# Altium PCB CurrentS_2.PcbDoc
Units mil, origin at the board's own origin, x right, y up, seen from the top; angles counter-clockwise.
Board outline 9000 x 3000 mil, 2 copper layers (Top Layer, Bottom Layer); 70 components, 36 nets, 196 pads, 18 vias.
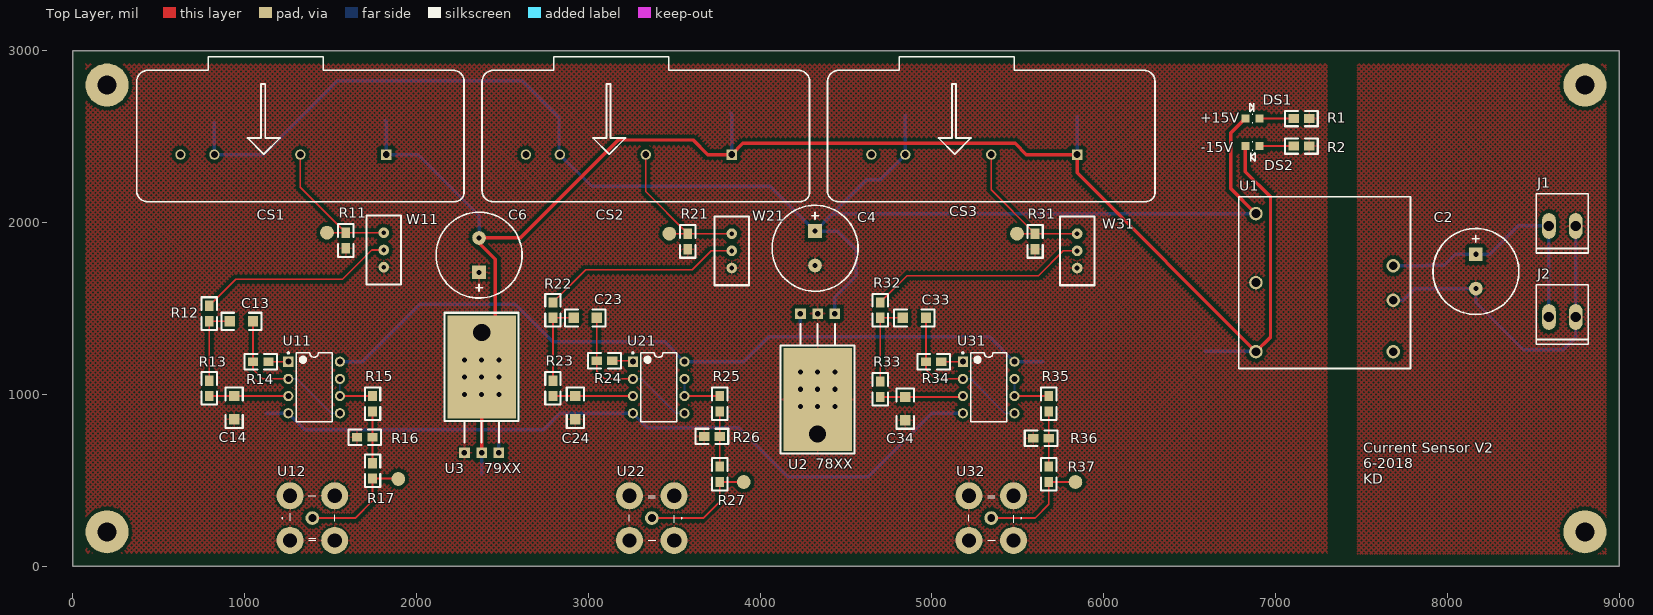
[diagram p0: Top Layer view]
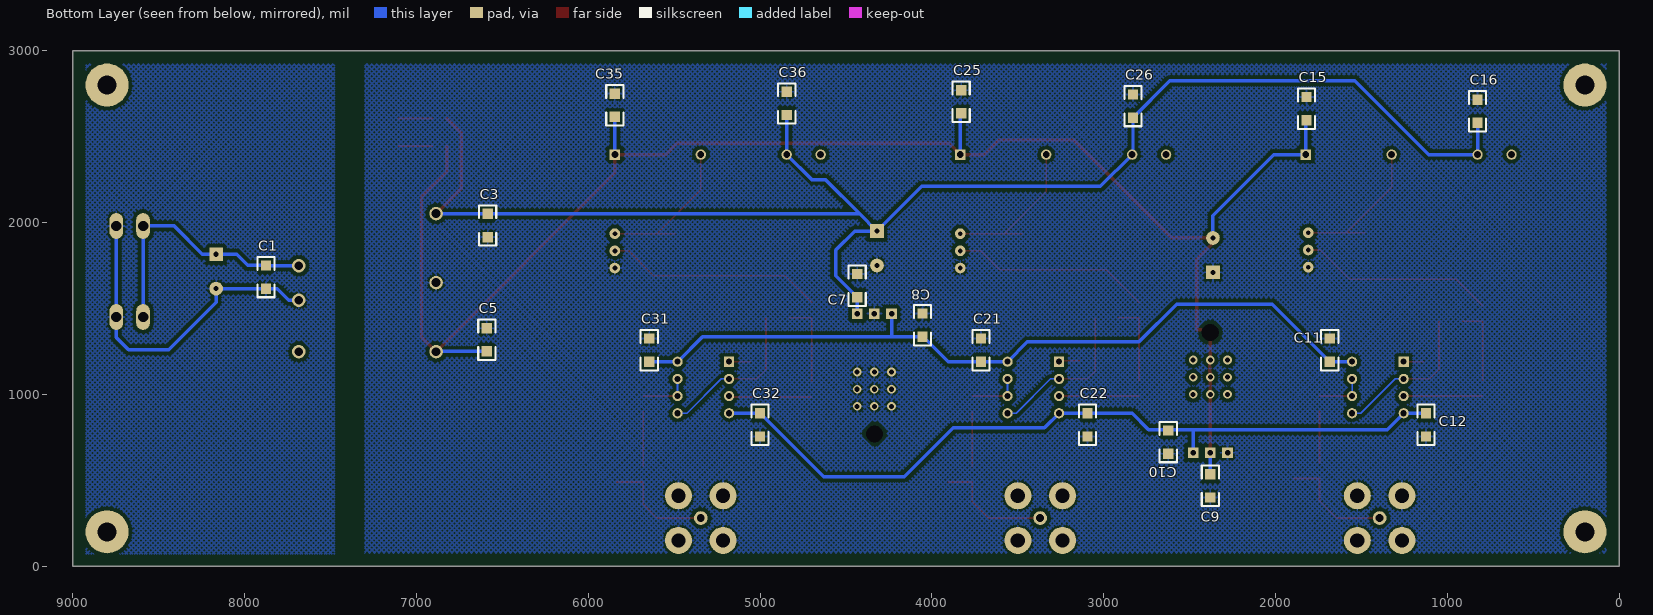
[diagram p1: Bottom Layer view, seen from below]

## Layer stack, top to bottom
Top Solder: solder mask 0.4, Solder Resist, Dk 3.5
Top Layer: signal copper 1.4
Dielectric 1: dielectric 12.6, FR-4, Dk 4.8
Bottom Layer: signal copper 1.4
Bottom Solder: solder mask 0.4, Solder Resist, Dk 3.5

## Board outline
0,0 9000,0 9000,3000 0,3000

## Design rules (kind name [scope] priority, off if disabled: settings)
AssemblyTestPointUsage [All] p1: valid=2
Clearance [All] p1: gap=20 ignorepadtopadclearanceinfootprint=FALSE
Height [All] p1: minheight=0 maxheight=2000 prefheight=500
HoleSize [All] p1: absolutevalues=TRUE maxlimit=150 minlimit=1 maxpercent=80.000 minpercent=20.000
NetAntennae [All] p1: netantennaetolerance=1
PolygonConnect [All] p1: connectstyle=Relief reliefconductorwidth=10 reliefentries=4 polygonreliefangle="90 Angle" airgapwidth=10
RoutingVias [All] p1: holewidth=28 width=50 viastyle="Through Hole" minholewidth=28 minwidth=50 maxholewidth=30 maxwidth=50
SilkToSilkClearance [All] p1: silktosilkclearance=5
SilkToSolderMaskClearance [IsPad] p1: minsilkscreentomaskgap=5 clearancetoexposedcopper=TRUE
SolderMaskExpansion [All] p1: expansion=4
UnRoutedNet [All] p1: checkbadconnections=TRUE
Width Pwr_Width [(InNet('+Vin') OR InNet('-Vin') OR InNet('+15V') OR InNet('-15V') OR InNet('+9V') OR InNet('-9V'))] p1: maxlimit=30 minlimit=20 preferedwidth=20
Width [All] p2: maxlimit=10 minlimit=10 preferedwidth=10
23 further rules are at their usual default settings.

## Components (designator, comment, footprint, x,y, rotation, side; value= is the part's Value field where it differs from the comment)
C1 "CAP1" C1206 7875,1615 r90 bottom value=100pF
C2 "ECAP" CAP.2/.5 8165,1815 r270 top value=10uF/10V
C3 "CAP1" C1206 6585,1915 r90 bottom value=100pF
C4 "ECAP" CAP.2/.5 4320,1950 r270 top value=10uF/10V
C5 "CAP1" C1206 6590,1250 r90 bottom value=100pF
C6 "ECAP" CAP.2/.5 2365,1710 r90 top value=10uF/10V
C7 "CAP1" C1206 4435,1700 r270 bottom value=100pF
C8 "CAP1" C1206 4055,1470 r270 bottom value=100pF
C9 "CAP1" C1206 2380,400 r90 bottom value=100pF
C10 "CAP1" C1206 2625,655 r90 bottom value=100pF
C11 "CAP1" C1206 1685,1325 r270 bottom value=100pF
C12 "CAP1" C1206 1125,755 r90 bottom value=100pF
C13 "CAP1" C1206 915,1425 r0 top value=100pF
C14 "CAP1" C1206 940,855 r90 top value=100pF
C15 "CAP1" C1206 1820,2730 r270 bottom value=100pF
C16 "CAP1" C1206 825,2715 r270 bottom value=100pF
C21 "CAP1" C1206 3715,1325 r270 bottom value=100pF
C22 "CAP1" C1206 3095,755 r90 bottom value=100pF
C23 "CAP1" C1206 2915,1445 r0 top value=100pF
C24 "CAP1" C1206 2925,855 r90 top value=100pF
C25 "CAP1" C1206 3830,2770 r270 bottom value=100pF
C26 "CAP1" C1206 2830,2745 r270 bottom value=100pF
C31 "CAP1" C1206 5645,1325 r270 bottom value=100pF
C32 "CAP1" C1206 5000,755 r90 bottom value=100pF
C33 "CAP1" C1206 4830,1445 r0 top value=100pF
C34 "CAP1" C1206 4845,850 r90 top value=100pF
C35 "CAP1" C1206 5845,2750 r270 bottom value=100pF
C36 "CAP1" C1206 4845,2760 r270 bottom value=100pF
CS1 "LA 125-P" "LA 125-P" 2277.76,2885.16 r180 top locked
CS2 "LA 125-P" "LA 125-P" 4287.76,2885.16 r180 top locked
CS3 "LA 125-P" "LA 125-P" 6297.76,2885.16 r180 top locked
DS1 "SML-LXT0805GW-TR" LUMX-SML-LXT0805_V 6865,2605 r0 top
DS2 "SML-LXT0805GW-TR" LUMX-SML-LXT0805_V 6865,2445 r180 top
J1 "CON2" 3100-8-102-01 8588,1968 r270 top
J2 "CON2" 3100-8-102-01 8588,1438 r270 top
R1 "Res1" R0805 7195,2605 r180 top value=698
R2 "Res1" R0805 7195,2445 r180 top value=698
R11 "Res1" R0805 1590,1850 r90 top value=1K
R12 "Res1" R0805 795,1425 r90 top value=1K
R13 "Res1" R0805 795,990 r90 top value=1K
R14 "Res1" R0805 1050,1190 r0 top value=1K
R15 "Res1" R0805 1745,900 r90 top value=1K
R16 "Res1" R0805 1745,750 r180 top value=1K
R17 "Res1" R0805 1745,510 r90 top value=1K
R21 "Res1" R0805 3580,1845 r90 top value=1K
R22 "Res1" R0805 2795,1445 r90 top value=1K
R23 "Res1" R0805 2795,990 r90 top value=1K
R24 "Res1" R0805 3050,1195 r0 top value=1K
R25 "Res1" R0805 3765,900 r90 top value=1K
R26 "Res1" R0805 3765,755 r180 top value=1K
R27 "Res1" R0805 3765,490 r90 top value=1K
R31 "Res1" R0805 5600,1845 r90 top value=1K
R32 "Res1" R0805 4700,1445 r90 top value=1K
R33 "Res1" R0805 4700,985 r90 top value=1K
R34 "Res1" R0805 4965,1190 r0 top value=1K
R35 "Res1" R0805 5680,900 r90 top value=1K
R36 "Res1" R0805 5680,745 r180 top value=1K
R37 "Res1" R0805 5680,490 r90 top value=1K
U1 "PDQ15-Q24-D15-D" PDQ15-Q24-D15-D 6784.61,2150 r270 top
U2 "78XX" TO-220#1 4435,1470 r180 top locked
U3 "79XX" TO-220#2 2280,660 r0 top locked
U11 "OPA2132P" P0008A 1405,1040 r0 top locked
U12 "BNC Elbow male" 5-1814400-1 1394.92,280.08 r180 top value=Value
U21 "OPA2132P" P0008A 3410,1040 r0 top locked
U22 "BNC Elbow male" 5-1814400-1 3369.96,280.08 r0 top value=Value
U31 "OPA2132P" P0008A 5330,1040 r0 top locked
U32 "BNC Elbow male" 5-1814400-1 5345,280.08 r0 top value=Value
W11 "RPot1" VR5 1810,1740 r90 top value=1K
W21 "RPot1" VR5 3835,1735 r90 top value=1K
W31 "RPot1" VR5 5845,1735 r90 top value=1K

## Footprints (in the part's own frame and the unit in brackets; to place one, negate y for a bottom-side part, rotate by r counter-clockwise, add the part's x,y. Pads: shape width x height; smd on the part's side, far side on the other; paste and mask are expansions set on the pad)
5-1814400-1 [mm]
  round 2.032 / inner round 1.524 / far side round 2.032 hole 1.17: 1(0,0)
  round 4 hole 2.11: 2(-3.3,3.3) 3(-3.3,-3.3) 5(3.3,3.3)
  round 4 hole 2.11 paste+1: 4(3.3,-3.3)
  silkscreen extent -3.3,-3.3 4.5,3.3, body extent 0,0 0.25,0.25, height 0.25
3100-8-102-01 [mil]
  oval 150x80 hole 60: 1(-12,2) 2(-12,158)
  silkscreen extent -200,-71 146,231
C1206 [mil]
  rect 60x60 smd: 1(0,0) 2(135,0)
  silkscreen extent -50,-50 185,50, body extent -10,-30 155,35, height 50
CAP.2/.5 [mil] "ESMG500ELL102MK25S"
  rect 80x80 hole 30: 1(0,0)
  round 80 hole 30: 2(200,0)
  silkscreen extent -150,-250 350,250
"LA 125-P" [mil] "LEM hall-effect current sensor(footprint)"
  round 60 hole 40: 1(952.76,490.16) 2(1452.76,490.16) 4(1650.39,490.16)
  rect 60x60 hole 40: 3(452.76,490.16)
  silkscreen extent 0,-79 1906,764
LUMX-SML-LXT0805_V [mm] "SMD, 2-Leads, Body 2x1.25mm"
  rect 1.2x1.2 smd: 1(-1.05,0) 2(1.05,0)
  silkscreen extent -0.41,-0.63 0.23,2.25, body extent -1,-0.63 1,0.63, height 0.8
P0008A [mm] "DIP, 8-Leads, Body 10.15x6.6mm, Pitch 2.54mm"
  rect 1.5x1.5 hole 0.9: 1(-3.81,3.81)
  round 1.5 hole 0.9: 2(-3.81,1.27) 3(-3.81,-1.27) 4(-3.81,-3.81) 5(3.81,-3.81) 6(3.81,-1.27) 7(3.81,1.27) 8(3.81,3.81)
  silkscreen extent -3.93,-5.1 2.65,5.23, body extent -3.95,-5.07 3.95,5.07, height 5.08
PDQ15-Q24-D15-D [mm] "+/-15V 15W output DC/DC converter"
  round 2 hole 1.3: 1(10.2,22.85) 2(15.3,22.85) 3(2.5,2.55) 4(12.7,2.55) 5(22.9,2.55) 6(22.9,22.85)
  silkscreen extent 0,0 25.4,25.4, body extent 0.1,0.1 25.5,25.5, height 10.2
R0805 [mil]
  rect 60x50 smd: 1(0,0) 2(90,0)
  silkscreen extent -50,-45 140,45, body extent -10,-25 100,25, height 40
TO-220#1 [mil]
  rect 62x62 hole 32: 1(0,0) 2(100,0) 3(200,0)
  round 60 hole 100: 4(100,700)
  rect 400x600 smd: 5(100,500)
  silkscreen extent -115,60 315,815
TO-220#2 [mil]
  rect 62x62 hole 32: 1(0,0) 2(100,0) 3(200,0)
  round 60 hole 100: 4(100,700)
  rect 400x600 smd mask+4: 5(100,500)
  silkscreen extent -115,60 315,815
VR5 [mil]
  round 62 hole 28: 1(0,0) 2(100,0) 3(200,0)
  silkscreen extent -100,-100 300,100

## Part data
C1 C3 C5 C7 C8 C9 C10 C11 C12 C13 C14 C15 C16 C21 C22 C23 C24 C25 C26 C31 C32 C33 C34 C35 C36: library part C3216C0G2J101J060AA, "100pF ±5% 630V C0G, NP0 Ceramic Capacitor -55°C ~ 125°C Surface Mount, MLCC 1206 (3216 Metric) 0.126\" L x 0.063\" W (3.20mm x 1.60mm)", Manufacturer="Generic Components", Class I=Passive, Class II=Capacitor, Published=8-Jun-2000, Publisher="Altium Limited", Revision="July-2002: Re-released for DXP Platform."
C2 C4 C6: "Polarized Capacitor (Surface Mount)", Manufacturer="Generic Components", Class I=Passive, Class II=Capacitor, Published=8-Jun-2000, Publisher="Altium Limited", Revision="July-2002: Re-released for DXP Platform."
CS1 CS2 CS3: "Hall-effect current transducer from LEM", Case/Package=125, Manufacturer=LEM, Manufacturer Part Number=LA125-P, Max Frequency=100kHz, Max Operating Temperature=85°C, Max Supply Voltage (DC)=15V, Min Operating Temperature=-40°C, Min Supply Voltage (DC)=12V, Secondary Current=125mA, Supplier Part Number 1=R1039558, Accuracy=0.8%, ComponentLink1Description=https://datasheet.ciiva.com/3327/la125p-eng-tds-3327505.pdf, ComponentLink1URL=https://datasheet.ciiva.com/3327/la125p-eng-tds-3327505.pdf, ComponentLink2Description=https://datasheet.ciiva.com/1309/51624-1309927.pdf, ComponentLink2URL=https://datasheet.ciiva.com/1309/51624-1309927.pdf, Mount=PCB, Operating Supply Voltage=15V, REACH SVHC="No SVHC", Response Time=1us, Stock 2=95, Supplier 1="Allied Electronics", Supplier 2=Element14, Supplier 3=Newark, Supplier Part Number 2=1617406, Supplier Part Number 3=01P0384, Wire/Cable Diameter=11mm
DS1 DS2: library part CMP-1724-00001-1, "LED, GREEN, 565 nm, 2 V, -25 to 80 degC, 2-Pin SMD, RoHS, Tape and Reel", Case\/Package=0805, Case Code (Metric)=2012, Max Operating Temperature="85 degC", Min Operating Temperature="-25 degC", Package Quantity=4000, Case Code (Imperial)=0805, ComponentLink1Description="Manufacturer URL", ComponentLink1URL=http://www.lumexinstruments.com/, ComponentLink2Description=Datasheet, ComponentLink2URL=http://www.lumex.com/content/files/ProductAttachment/SML-LXT0805GW-TR.pdf, DatasheetVersion="Rev. F, 09/2009", Length="2 mm", Mount="Surface Mount", Mounting Technology="Surface Mount", PackageDescription="2-Pin Surface Mount Device, Body 2 x 1.25 mm", PackageReference=SML-LXT0805, Packaging="Tape and Reel", REACH SVHC="No SVHC", RoHSCompliant=true, Width="1.25 mm"
J1 J2: "Connector"
R1 R2: library part RC0805FR-07698RL, "RES SMD 698 OHM 1% 1/8W 0805", Manufacturer="Generic Components", Class I=Passive, Class II=Resistor, Published=8-Jun-2000, Publisher="Altium Limited", Revision="July-2002: Re-released for DXP Platform."
R11 R21 R31: library part RC0805JR-0733RL, "YAGEO (PHYCOMP)         RC0805JR-0733RL             SMD Chip Resistor, Thick Film, 33 ohm, 150 V, 0805 [2012 Metric], 250 mW,  5%, RC Series", Manufacturer="Generic Components", Class I=Passive, Class II=Resistor, Published=8-Jun-2000, Publisher="Altium Limited", Revision="July-2002: Re-released for DXP Platform."
R12 R13 R14 R15 R16 R17 R22 R23 R24 R25 R26 R27 R32 R33 R34 R35 R36 R37: library part RC0805FR-071KL, "RES SMD 1K OHM 1% 1/8W 0805", Manufacturer="Generic Components", Class I=Passive, Class II=Resistor, Published=8-Jun-2000, Publisher="Altium Limited", Revision="July-2002: Re-released for DXP Platform."
U1: "Isolated DC/DC Converters 15W 9-36Vin +/-15V +/-500mA Iso Reg DIP", Case/Package=DIP, Isolation Voltage=1.5kV, Manufacturer=CUI, Max Input Voltage=36V, Max Operating Temperature=105°C, Max Output Current=500mA, Max Power Dissipation=15W, Min Input Voltage=9V, Min Operating Temperature=-40°C, Supplier Part Number 1=102-3878-ND, Voltage - Output 1=15V, Voltage - Output 2=-15V, ComponentLink1Description=http://www.cui.com/product/resource/digikeypdf/pdq15-d.pdf, ComponentLink1URL=http://www.cui.com/product/resource/digikeypdf/pdq15-d.pdf, Efficiency=88%, Features=UVLO,OVP, Height=0.4inch, Lead Free="Lead Free", Length=1inch, Manufacturer Part Number=PDQ15-Q24-D15-D, Mount="Through Hole", Number of Outputs=2, Packaging=Rail/Tube, Pricing 1="1=31.77, 5=31.524, 10=31.28, 25=30.7912, 50=29.325, 100=26.8813, 250=26.3925 (USD)", Stock 1=60, Supplier 1=Digi-Key, Supplier 2=Mouser, Supplier Part Number 2=490-PDQ15-Q24-D15-D, Width=1inch
U2: "1A linear positive voltage regulator", Case/Package=TO-220, Current Rating=1A, Dropout Voltage=2V, Manufacturer="ON Semiconductor", Manufacturer Part Number=MC7809CTG, Max Input Voltage=35V, Max Operating Temperature=125°C, Min Input Voltage=11V, Min Operating Temperature=0°C, Min Output Voltage=9V, Output Voltage Accuracy=4%, Package Quantity=50, Power Supply Rejection Ratio (PSRR)=61dB, Quiescent Current=8mA, Supplier Part Number 1=MC7809CTGOS-ND, Tolerance=5%, Accuracy=4%, ComponentLink1Description=https://datasheet.ciiva.com/2043/mc7800-d-2043830.pdf, ComponentLink1URL=https://datasheet.ciiva.com/2043/mc7800-d-2043830.pdf, ComponentLink2Description=https://datasheet.ciiva.com/8073/76526-8073704.pdf, ComponentLink2URL=https://datasheet.ciiva.com/8073/76526-8073704.pdf, ComponentLink3Description=https://datasheet.ciiva.com/16394/mc7800-d-16394474.pdf, ComponentLink3URL=https://datasheet.ciiva.com/16394/mc7800-d-16394474.pdf, ComponentLink4Description=https://datasheet.ciiva.com/14149/igspannungsregler-mc78xx-en-14149791.pdf, ComponentLink4URL=https://datasheet.ciiva.com/14149/igspannungsregler-mc78xx-en-14149791.pdf, ComponentLink5Description=https://datasheet.ciiva.com/25979/mc7800-d-25979775.pdf, ComponentLink5URL=https://datasheet.ciiva.com/25979/mc7800-d-25979775.pdf, ComponentLink6Description=https://datasheet.ciiva.com/26903/mc7809ctg-26903014.pdf, ComponentLink6URL=https://datasheet.ciiva.com/26903/mc7809ctg-26903014.pdf, Contact Plating=Tin,Matte, Halogen Free="Halogen Free", Height=0.62inch, Lead Free="Lead Free", Length=0.404inch, Max Output Current=1A, Mount="Through Hole", Nominal Output Voltage=9V, Number of Outputs=1, Number of Pins=3, Number of Regulators=1, Operating Supply Voltage=35V, Output Current=1A, Output Voltage=9V, Packaging=Rail/Tube, Polarity=Positive, Pricing 1="1=0.64, 10=0.548, 100=0.4091, 500=0.3214, 1000=0.2484 (USD)", Radiation Hardening=No, REACH SVHC="No SVHC", Stock 1=0, Supplier 1=Digi-Key, Weight=0.01lb, Width=0.19inch
U3: "1A linear negative voltage regulator", Case/Package=TO-220-3, Dropout Voltage=2V, Manufacturer="ON Semiconductor / Fairchild", Manufacturer Part Number=KA7909TU, Max Input Voltage=-35V, Max Operating Temperature=125°C, Max Output Current=1A, Min Input Voltage=-11.5V, Min Operating Temperature=0°C, Min Output Voltage=-9V, Output Voltage Accuracy=4%, Package Quantity=50, Power Supply Rejection Ratio (PSRR)=60dB, Quiescent Current=6mA, Supplier Part Number 1=KA7909TUFS-ND, Tolerance=5%, Accuracy=4%, ComponentLink1Description=https://datasheet.ciiva.com/26254/ka7924-26254938.pdf, ComponentLink1URL=https://datasheet.ciiva.com/26254/ka7924-26254938.pdf, ComponentLink2Description=https://datasheet.ciiva.com/14170/zpfairchild-spannungsregler-ka-en-14170555.pdf, ComponentLink2URL=https://datasheet.ciiva.com/14170/zpfairchild-spannungsregler-ka-en-14170555.pdf, ComponentLink3Description=https://datasheet.ciiva.com/3224/ka7924-3224893.pdf, ComponentLink3URL=https://datasheet.ciiva.com/3224/ka7924-3224893.pdf, ComponentLink4Description=https://datasheet.ciiva.com/17366/ka7909-17366829.pdf, ComponentLink4URL=https://datasheet.ciiva.com/17366/ka7909-17366829.pdf, ComponentLink5Description=https://datasheet.ciiva.com/46425/1855684-46425549.pdf, ComponentLink5URL=https://datasheet.ciiva.com/46425/1855684-46425549.pdf, Height=15.95mm, Lead Free="Lead Free", Length=10mm, Mount="Through Hole", Nominal Output Voltage=-9V, Number of Outputs=1, Number of Pins=3, Number of Regulators=1, Output Current=1A, Output Voltage=-9V, Packaging=Rail/Tube, Polarity=Negative, Pricing 1="1=0.66, 10=0.581, 100=0.4453, 500=0.352, 1000=0.2816 (USD)", Radiation Hardening=No, REACH SVHC="No SVHC", Stock 1=820, Supplier 1=Digi-Key, Weight=1.8g, Width=4.5mm
U11 U21 U31: library part CMP-0271-00384-3, "High Speed FET-Input Operational Amplifier, 5 to 36 V, -40 to 125 degC, 8-pin DIP (P8), Green (RoHS & no Sb/Br)", Manufacturer="Texas Instruments", Rating=Catalog, Total Supply Voltage(Max)(+5V is 5, +/-5V is 10)=36, Total Supply Voltage(Min)(+5V is 5, +/-5V is 10)=5, CMRR(Min)(dB)=96, Code_JEDEC=MS-001, ComponentLink1Description="Manufacturer URL", ComponentLink1URL=http://www.ti.com/, ComponentLink2Description=Datasheet, ComponentLink2URL=http://www.ti.com/lit/ds/symlink/opa2132.pdf, ComponentLink3Description="Package Specification", ComponentLink3URL=http://www.ti.com/litv/pdf/mpdi001b, DatasheetVersion=SBOS054A, Eco-Plan="Green (RoHS & no Sb/Br)", GBW(Typ)(MHz)=8, IIB(Max)(pA)=50, Iq per channel(Max)(mA)=4.8, Mounting Technology="Through Hole", Number of Channels=2, Offset Drift(Typ)(uV/C)=2, PackageDescription="8-Pin Plastic In-Line, Body 9.59 x 6.35 mm, Pitch 2.54 mm", PackageReference=P0008A, PackageVersion="4040082/E, 04/2010", Packing=TUBE, PartNumber=OPA2132P, Slew Rate(Typ)(V/us)=20, Sub Family="High Supply Voltage Amplifier (>=30V), Low Noise Amp (<=10nV/rtHz), Low Offset Voltage Amplifier (<=500uV), Precision Amplifier", Vio (25C)(Max)(mV)=0.5
U12 U22 U32: "BNC Low Profile Elbow Connector", Manufacturer_Part_Number=5-1634513-1, Copyright="Copyright (C) 2015 Accelerated Designs. All rights reserved", RefDes=RefDes, Type=Type, Vendor="Tyco Electronics"
W11 W21 W31: library part PV36W202C01B00, "TRIMMER 2K OHM 0.5W TH", Manufacturer="Generic Components", Class I=Passive, Class II=Potentiometer, Published=8-Jun-2000, Publisher="Altium Limited", Revision="July-2002: Re-released for DXP Platform.", Set Position=0.5

## Free pads (board coordinates)
  round 250 hole 110: 2(8800,2800) 3(200,2800) 4(200,200) 5(8800,200)
  round 80 smd: 6(1480,1940.92) 7(3472.01,1935) 8(5495,1935) 9(1895,507.69) 10(3905,490) 11(5835,490)

## Via types
v1: diameter 50, hole 30, Top Layer to Bottom Layer, 17 vias
v2: diameter 50, hole 28, Top Layer to Bottom Layer, 1 vias

## Nets (pads, with @x,y where several pads share a name; then routed paths per layer and width w, separated by ;. In a path a pad name is that pad's centre, name@x,y a point inside that pad or via, vN(x,y) a via of type N, cw(c..) or ccw(c..) an arc to the next point about the centre after c; other vN are vias at no path point)
+9V: C8.2 C11.2 C21.2 C31.2 U2.3 U11.8 U21.8 U31.8 | length 4622.6
  Bottom Layer w20: U11.8 C11.2 2020,1525 2575,1525 2795,1305 3445,1305 U21.8 C21.2 3905,1190 4050,1335 4235,1335 ; U2.3 4235,1335 ; C31.2 U31.8 5335,1335 4235,1335
+15V: C3.2 C4.1 C7.2 C16.2 C26.2 C36.2 CS1.2 CS2.2 CS3.2 DS1.1 U1.3 U2.1 | length 9104
  Top Layer w20: DS1.1 6740,2521.34 6740,2196.57 U1.3
  Bottom Layer w20: C16.2 CS1.2 1110,2395 1540,2825 2615,2825 C26.2 2830,2400 CS2.2 3020,2210 4060,2210 C4.1 ; U2.1 C7.2 4560,1690 4560,1840 4450,1950 C4.1 ; C36.2 CS3.2 4700,2250 4620,2250 4420,2050 ; U1.3 6883.43,2050 C3.2 4420,2050 ; C4.1 4420,2050
+Vin: C1.2 C2.1 J1.1 J2.1 U1.1 | length 1531.7
  Bottom Layer w20: U1.1 7873.43,1748.43 C1.2 7980,1750 8045,1815 C2.1 8245,1815 8410,1980 J1.1 J2.1
-9V: C10.2 C12.2 C22.2 C32.2 U3.3 U11.4 U21.4 U31.4 | length 4575.2
  Bottom Layer w20: C12.2 U11.4 1350,795 2480,795 ; U3.3 2480,795 ; U31.4 C32.2 4630,520 4160,520 3875,805 3345,805 U21.4 C22.2 2835,890 2740,795 2480,795
-15V: C5.1 C6.2 C9.2 C15.2 C25.2 C35.2 CS1.3 CS2.3 CS3.3 DS2.2 U1.5 U3.2 U3.4 U3.5 | length 9931.7
  Top Layer w20: U3.2 v1(2380,1000) v1(2380,1100) 2384.59,1159.65 2385,1165 v1(2380,1200) U3.4 ; U3.5@2380,1375 2460,1375 2460,1785 2365,1880 C6.2 2605,1910 3175,2480 3610,2480 3695,2395 CS2.3 3900,2460 5485,2460 5550,2395 CS3.3 5845,2288.43 U1.5 6970,1333.43 6970,2150 6823.66,2296.34 DS2.2
  Bottom Layer w20: C15.2 1825,2590 CS1.3 2010,2395 2365,2040 C6.2 ; C9.2 U3.2 ; C25.2 3835,2630 CS2.3 ; CS3.3 C35.2 ; C5.1 6883.43,1250 U1.5
  other v1: 2280,1000 2480,1000 2280,1100 2480,1100 2280,1200 2480,1200
-Vin: C1.1 C2.2 J1.2 J2.2 U1.2 | length 1962
  Bottom Layer w20: U1.2 7742.64,1547.64 7810,1615 C1.1 C2.2 8165,1535 8440,1260 8675,1260 8746,1331 J2.2 J1.2
GND: C3.1 C4.2 C5.2 C6.1 C7.1 C8.1 C9.1 C10.1 C11.1 C12.1 C14.1 C15.1 C16.1 C21.1 C22.1 C24.1 C25.1 C26.1 C31.1 C32.1 C34.1 C35.1 C36.1 R1.1 R2.1 R11.1 R16.2 R21.1 R26.2 R31.1 R36.2 U1.4 U2.2 U2.4 U2.5 U3.1 U12.2 U12.3 U12.4 U12.5 U22.2 U22.3 U22.4 U22.5 U32.2 U32.3 U32.4 U32.5 W11.1 W21.1 W31.1
  other v1: 4235,930 4435,930 4235,1030 4335,1030 4435,1030 4235,1130 4335,1130 4435,1130
  other v2: 4335,930
NetC13_1: C13.1 R12.1 R13.2 | length 465
  Top Layer w10: R13.2 R12.1 C13.1
NetC13_2: C13.2 R14.1 U11.2 U11.5 | length 890.6
  Top Layer w10: C13.2 R14.1 1050,1145 1105,1090 U11.2
  Bottom Layer w10: U11.2 1305,1090 1505,890 U11.5
NetC14_2: C14.2 R13.1 U11.3 | length 460
  Top Layer w10: R13.1 C14.2 U11.3
NetC23_1: C23.1 R22.1 R23.2 | length 485
  Top Layer w10: R23.2 R22.1 C23.1
NetC23_2: C23.2 R24.1 U21.2 U21.5 | length 921.5
  Top Layer w10: C23.2 R24.1 3050,1135 3095,1090 U21.2
  Bottom Layer w10: U21.2 3310,1090 3510,890 U21.5
NetC24_2: C24.2 R23.1 U21.3 | length 465
  Top Layer w10: R23.1 C24.2 U21.3
NetC33_1: C33.1 R32.1 R33.2 | length 500
  Top Layer w10: R33.2 R32.1 C33.1
NetC33_2: C33.2 R34.1 U31.2 U31.5 | length 920.6
  Top Layer w10: C33.2 R34.1 4965,1145 5020,1090 U31.2
  Bottom Layer w10: U31.2 5225,1090 5425,890 U31.5
NetC34_2: C34.2 R33.1 U31.3 | length 482.1
  Top Layer w10: R33.1 C34.2 5175,985 U31.3
NetCS1_1: CS1.1 pad.6 R11.2 W11.3 | length 893.8
  Top Layer w10: CS1.1 1325,2205 R11.2@1589.08,1940.92 ; pad.6 R11.2@1589.08,1940.92 ; W11.3 R11.2 R11.2@1589.08,1940.92
NetCS2_1: CS2.1 pad.7 R21.2 W21.3 | length 924.5
  Top Layer w10: CS2.1 3335,2180 R21.2 ; pad.7 R21.2 ; W21.3 R21.2
NetCS3_1: CS3.1 pad.8 R31.2 W31.3 | length 915.6
  Top Layer w10: CS3.1 5345,2190 R31.2 ; pad.8 R31.2 ; W31.3 R31.2
NetDS1_2: DS1.2 R1.2 | length 198.7
  Top Layer w10: DS1.2 R1.2
NetDS2_1: DS2.1 R2.2 | length 198.7
  Top Layer w10: DS2.1 R2.2
NetR12_2: R12.2 W11.2 | length 1149.6
  Top Layer w10: R12.2 950,1670 1570,1670 1740,1840 W11.2
NetR14_2: R14.2 U11.1 | length 115
  Top Layer w10: R14.2 U11.1
NetR15_1: R15.1 R16.1 R17.2 | length 300
  Top Layer w10: R17.2 R16.1 R15.1
NetR15_2: R15.2 U11.6 U11.7 | length 290
  Top Layer w10: U11.6 R15.2
  Bottom Layer w10: U11.6 U11.7
NetR17_1: pad.9 R17.1 U12.1 | length 672.4
  Top Layer w10: U12.1 1645.08,280.08 1745,380 R17.1 1892.69,510 pad.9
NetR22_2: R22.2 W21.2 | length 1164.3
  Top Layer w10: R22.2 2985,1725 3605,1725 3715,1835 W21.2
NetR24_2: R24.2 U21.1 | length 122.1
  Top Layer w10: R24.2 3255,1195 U21.1
NetR25_1: R25.1 R26.1 R27.2 | length 320
  Top Layer w10: R27.2 R26.1 R25.1
NetR25_2: R25.2 U21.6 U21.7 | length 305
  Top Layer w10: U21.6 R25.2
  Bottom Layer w10: U21.6 U21.7
NetR27_1: pad.10 R27.1 U22.1 | length 689.4
  Top Layer w10: U22.1 3670.08,280.08 3765,375 R27.1 pad.10
NetR32_2: R32.2 W31.2 | length 1269.3
  Top Layer w10: R32.2 4855,1690 5620,1690 5765,1835 W31.2
NetR34_2: R34.2 U31.1 | length 125
  Top Layer w10: R34.2 U31.1
NetR35_1: R35.1 R36.1 R37.2 | length 320
  Top Layer w10: R37.2 R36.1 R35.1
NetR35_2: R35.2 U31.6 U31.7 | length 300
  Top Layer w10: U31.6 R35.2
  Bottom Layer w10: U31.6 U31.7
NetR37_1: pad.11 R37.1 U32.1 | length 653.1
  Top Layer w10: U32.1 5600.08,280.08 5680,360 R37.1 pad.11
pads on no net: CS1.4 CS2.4 CS3.4 U1.6

## Polygon pours and split planes (outlines as drawn)
GND on Top Layer "GND_top" (hatched 45Degree grid 20 track 8, pour order 8): 7300,2925 7300,75 7295,75 75,75 75,2925
-Vin on Top Layer "-Vin_top" (hatched 45Degree grid 20 track 8, pour order 2): 7475,2925 8925,2925 8925,70 7475,70
GND on Bottom Layer "GND_bottom" (hatched 45Degree grid 20 track 8, pour order 14): 7300,2925 7300,75 75,75 75,2925
-Vin on Bottom Layer "-Vin_bottom" (hatched 45Degree grid 20 track 8, pour order 12): 8925,2925 7475,2925 7475,70 8925,70

## Silkscreen, mask and mechanical layers (free items; w line width, h text height)
Top Overlay:
  text "+15V" at 6560,2580 h60
  text "-15V" at 6565,2410 h60
  text "Current Sensor V2 / 6-2018 / KD" at 7510,480 h60
Mechanical 1:
  lines w10: 5,5 5,2995 8995,2995 8995,5 5,5